# EAGLE board PCB_E_BOOK_v1_v108 (EAGLE 9.7.0)
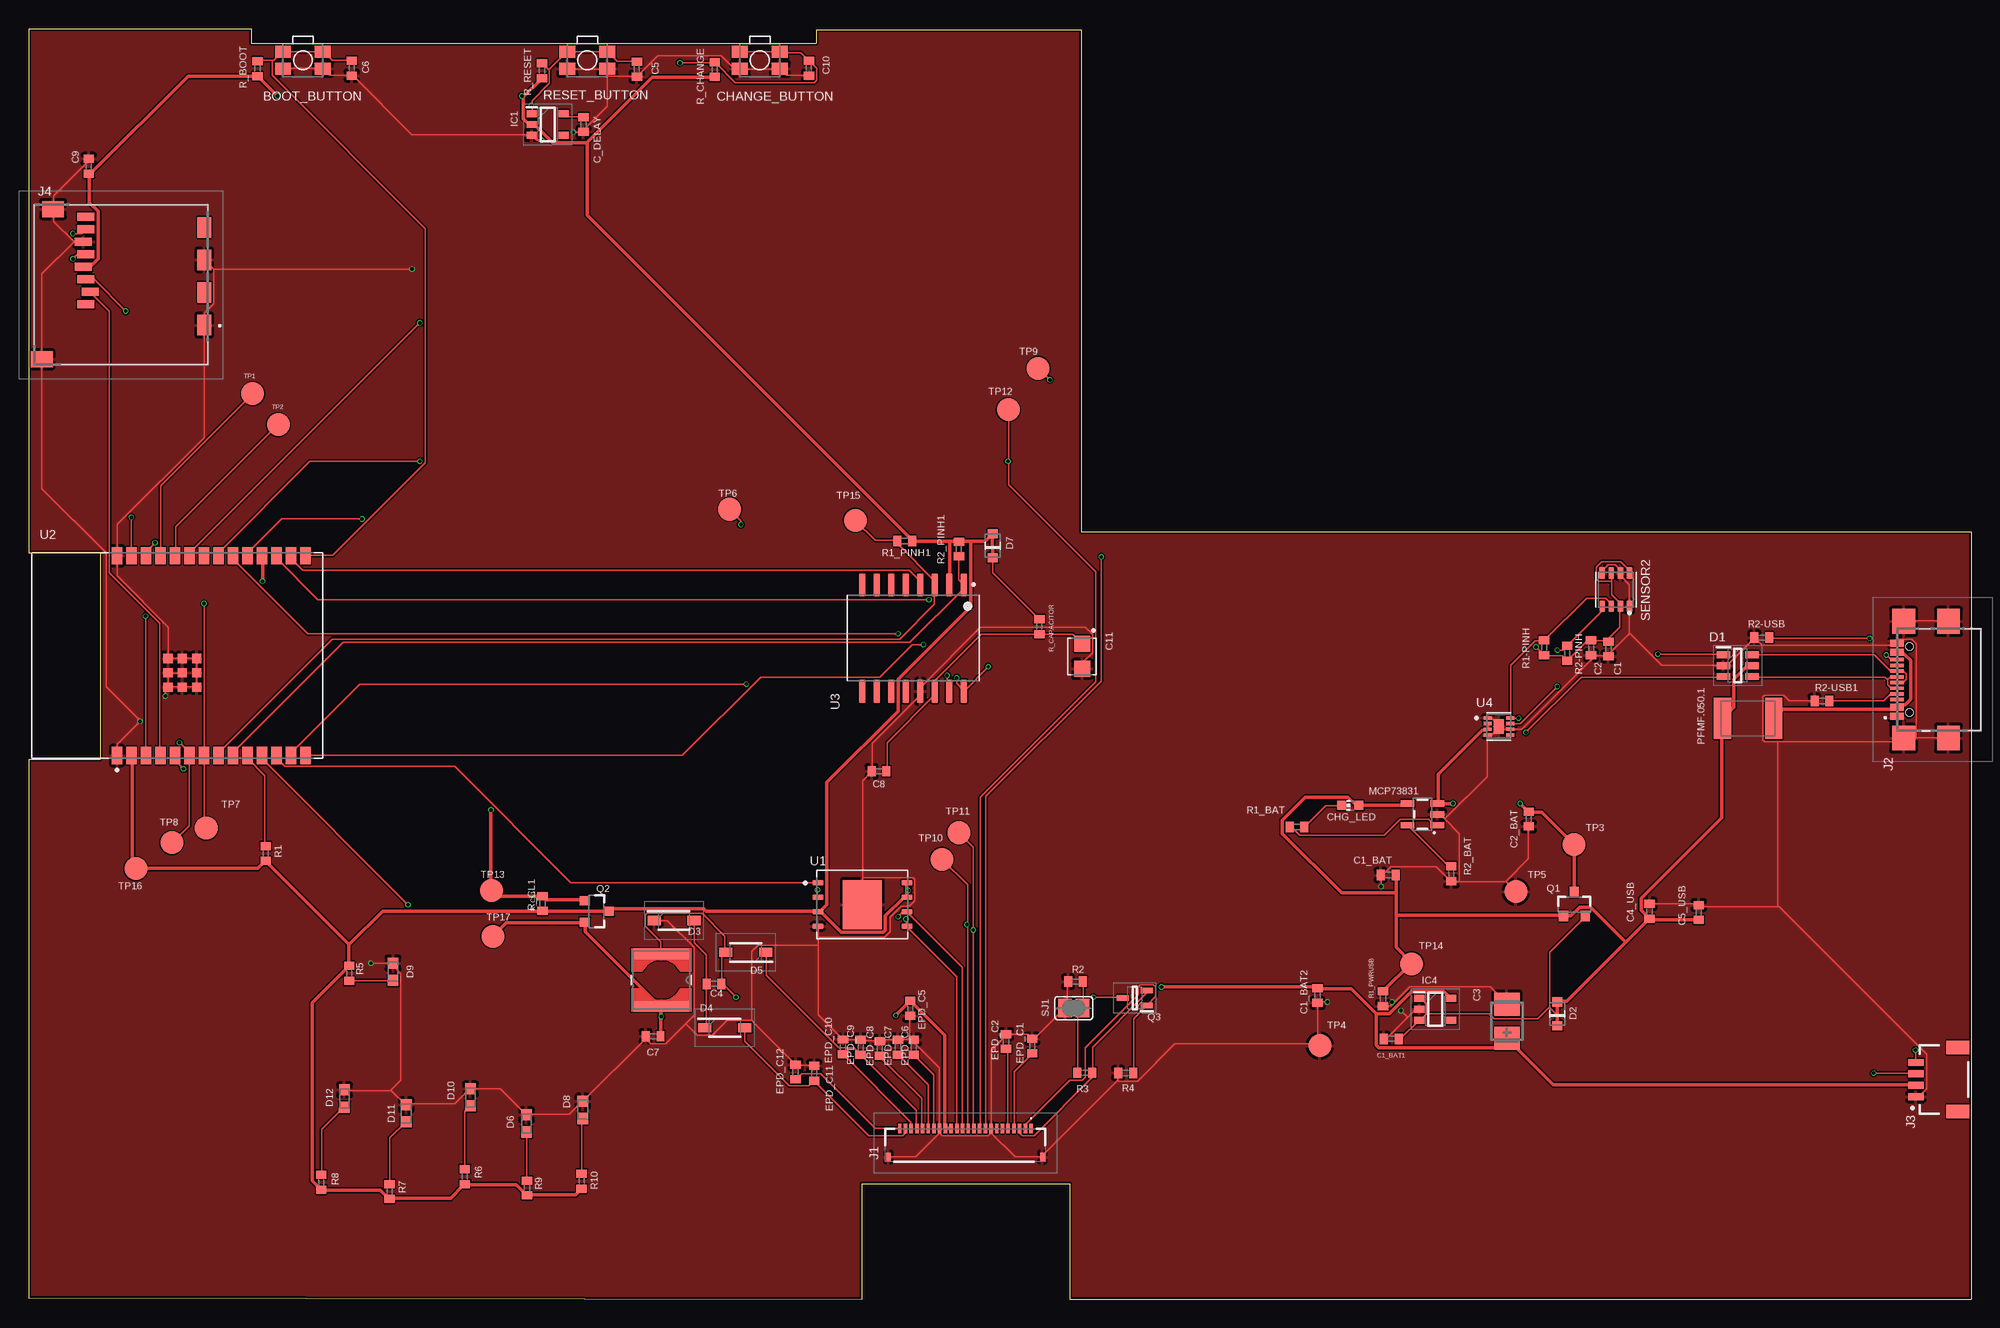
[diagram p0: board, top side]
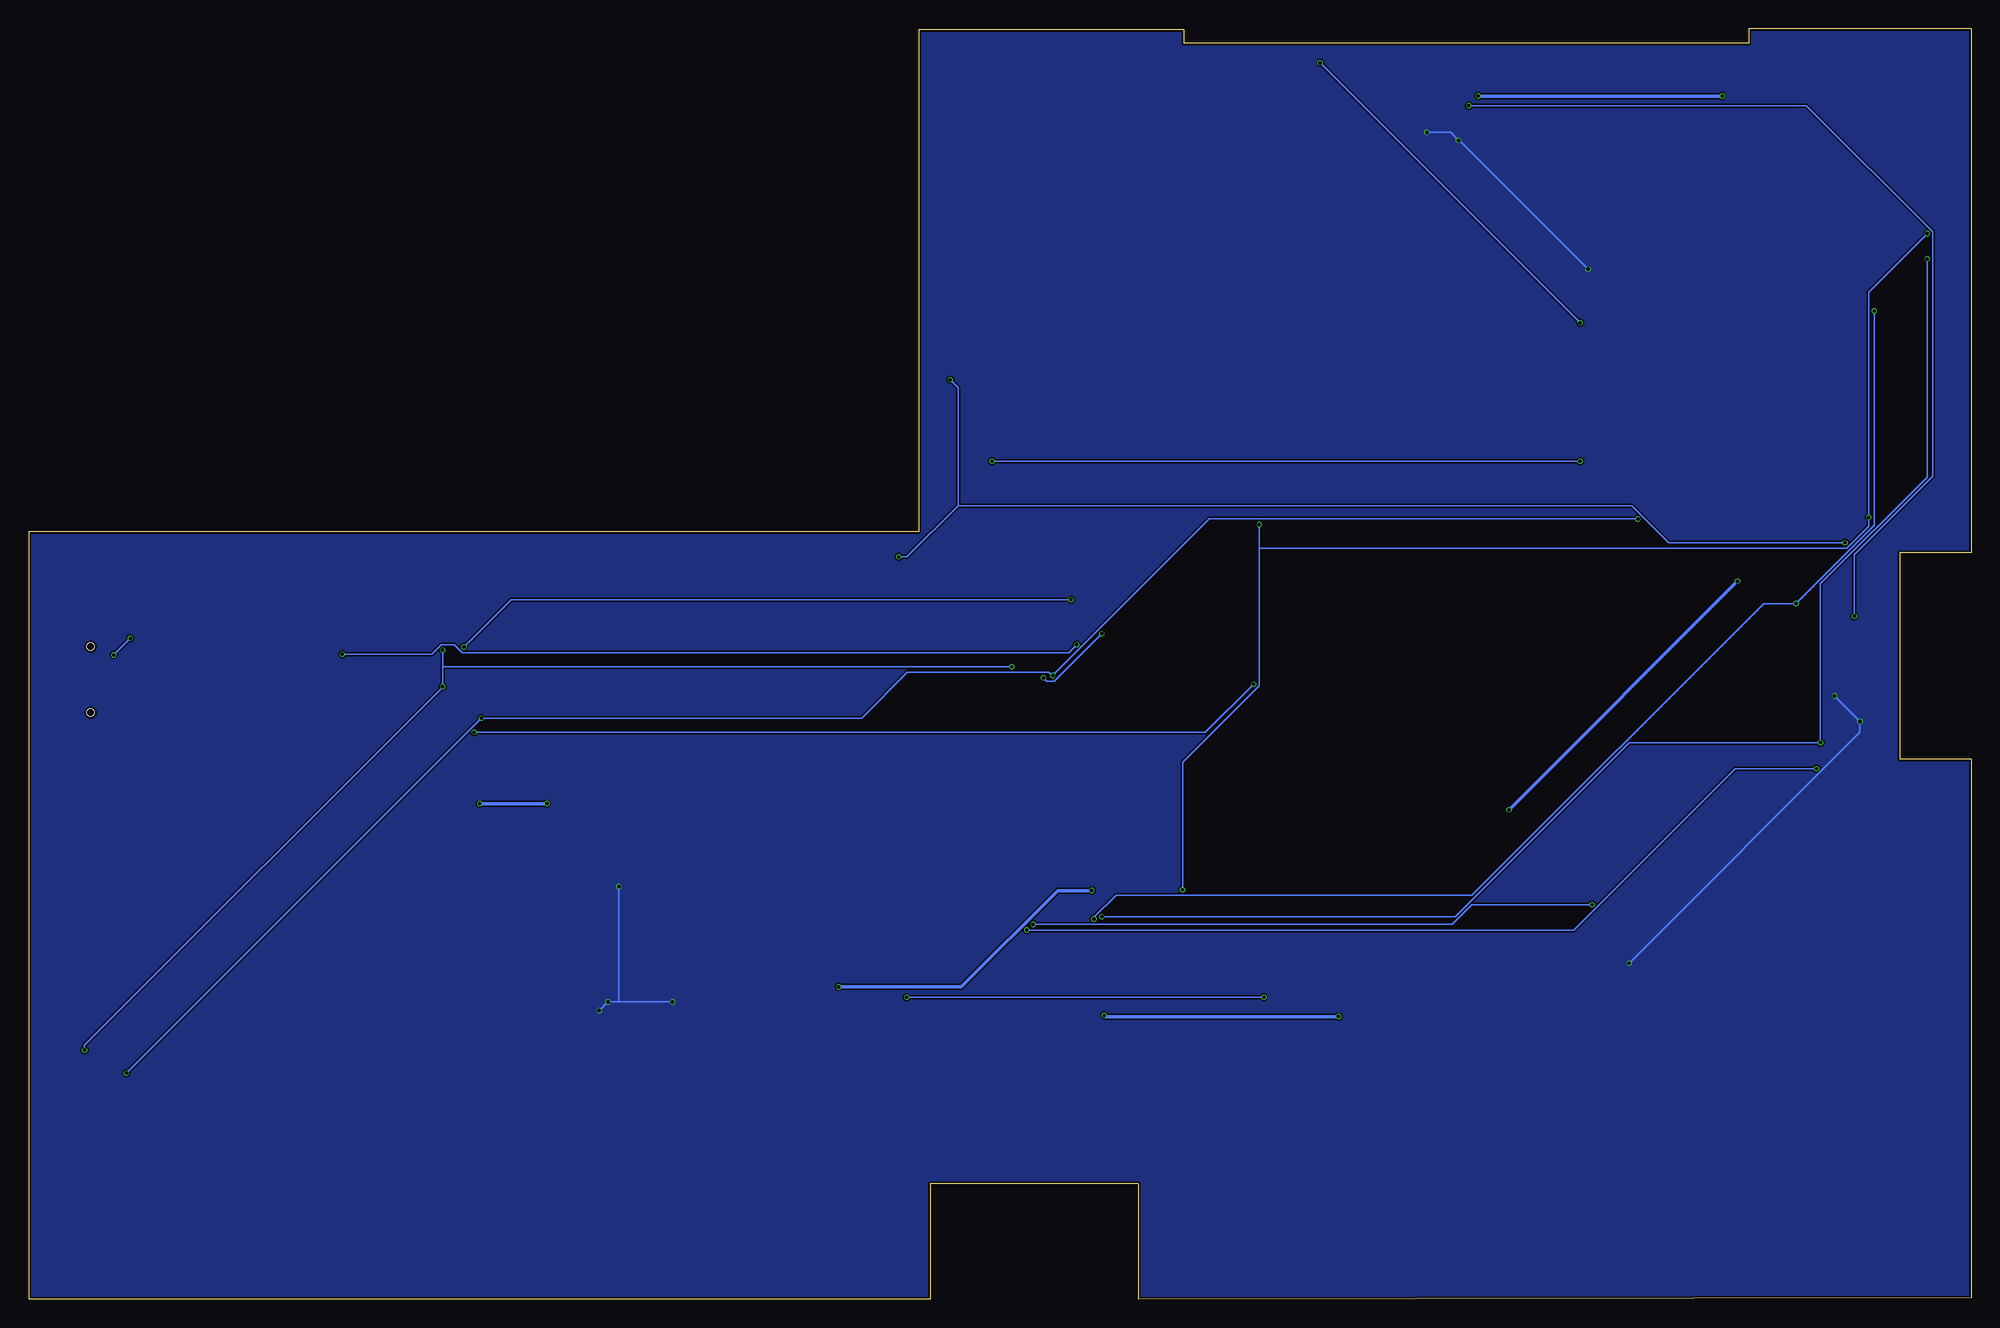
[diagram p1: board, bottom side, seen from below]

Size 170.2 x 111.3 mm. Coordinates in mm from the lower left corner, seen from the top.
Outline: 92.2,67.2 170.2,67.2 170.2,0 91.2,0 91.2,10.1 73,10.1 73,0 0,0.1 0,47.3 6.3,47.3 6.3,65.4 0,65.4 0,111.3 19.5,111.3 19.5,110 69,110 69,111.2 92.2,111.2 92.2,67.2
Copper layers (1*16): Top 0.035mm / dielectric 1.6mm / Bottom 0.035mm
Design rules "jlcpcb-2layers.dru": minimum track width 0.15mm, minimum drill 0.3mm, track to track 5mil, track to pad 5mil, pad to pad 5mil, via to via 5mil, smd to smd 5mil, copper to edge 0.2mm, drill to drill 6mil, minimum pad ring 10mil, minimum via ring 3mil, stop-mask expansion 4mil, vias tented up to drill 0mil, thermal gap 10mil
Net classes: 1 Power_Src: width 0.3 mm

## Footprints (pad centres in the part's own frame; a part is rotated, then mirrored left to right if it is on the bottom)
MYBUTTON = smd 1.4 x 1.05: 1 1.75,0.75; 2 -1.75,0.75; 3 -1.75,-0.75; 4 1.75,-0.75
EAGLE-LTSPICE_C0402 = smd 0.7 x 0.9: 1 -0.65,0; 2 0.65,0
RCL_CT3528 = smd 2 x 2.2: + -1.5,0; - 1.5,0
CAPCP3225X100N = smd 1.4 x 1.4: 1 -1.1,0; 2 1.1,0
ADAFRUIT_CHIP-LED0603 = smd 0.8 x 0.8: A 0,-0.75; C 0,0.75
SOT95P280X145-6N = smd 1.2 x 0.6: 1 -1.25,0.95; 2 -1.25,0; 3 -1.25,-0.95; 4 1.25,-0.95; 5 1.25,0; 6 1.25,0.95
ESP32_WROVER_AVX---SD0805S020S1R0_AVX_SD0805S020S1R0_0 = smd 0.8 x 0.9: 1 -1.05,0; 2 1.05,0
SOD3716X135N = smd 1.15 x 0.8: 1 -1.75,0; 2 1.75,0
DIOC1608X36N = smd 0.97 x 0.94: 1 -0.75,0; 2 0.75,0
SOT95P280X125-5N = smd 0.9 x 0.6: 1 -1.4,0.95; 2 -1.4,0; 3 -1.4,-0.95; 4 1.4,-0.95; 5 1.4,0.95
SOT95P280X120-5N = smd 0.9 x 0.6: 1 -1.4,0.95; 2 -1.4,0; 3 -1.4,-0.95; 4 1.4,-0.95; 5 1.4,0.95
FH34SRJ24S05SH99 = smd 0.3 x 0.8: 1 5.75,1.45; 2 5.25,1.45; 3 4.75,1.45; 4 4.25,1.45; 5 3.75,1.45; 6 3.25,1.45; 7 2.75,1.45; 8 2.25,1.45; 9 1.75,1.45; 10 1.25,1.45; 11 0.75,1.45; 12 0.25,1.45; 13 -0.25,1.45; 14 -0.75,1.45; 15 -1.25,1.45; 16 -1.75,1.45; 17 -2.25,1.45; 18 -2.75,1.45; 19 -3.25,1.45; 20 -3.75,1.45; 21 -4.25,1.45; 22 -4.75,1.45; 23 -5.25,1.45; 24 -5.75,1.45 | smd 0.4 x 0.8: MP1 6.75,-1.05; MP2 -6.75,-1.05
SAMACSYS_PARTS_USB4110GFA = smd 0.3 x 1.15: A1 -3.35,3.678; A4 -2.55,3.678; A5 -1.25,3.678; A6 -0.25,3.678; A7 0.25,3.678; A8 1.25,3.678; A9 2.55,3.678; A12 3.35,3.678; B1 3.05,3.678; B4 2.25,3.678; B5 1.75,3.678; B6 0.75,3.678; B7 -0.75,3.678; B8 -1.75,3.678; B9 -2.25,3.678; B12 -3.05,3.678 | smd 2.18 x 2: MP1 -5.11,-0.827; MP2 5.11,-0.827; MP3 -5.11,3.103; MP4 5.11,3.103 | hole 0.65: -2.89,2.603; 2.89,2.603
JST04_1MM_RA = smd 0.6 x 1.35: 1 -1.5,0; 2 -0.5,0; 3 0.5,0; 4 1.5,0 | smd 1.2 x 2: NC1 2.8,-3.675; NC2 -2.8,-3.675
112ATAARR03ATTEND = smd 1.8 x 1.2: G1 10.6,10.4; G2 4.9,10.4; S1 7.75,10.4; S2 2.05,10.4 | smd 1.4 x 1.9: G3 13.6,-3.85; G4 0.45,-2.85 | smd 0.7 x 1.5: P1 8.8,0; P2 7.7,0.4; P3 6.6,0; P4 5.5,-0.2; P5 4.4,0; P6 3.3,-0.2; P7 2.2,0; P8 1.1,0
IND_4828-WE-TPC_WRE = smd 0.889 x 4.826: 1 -2.286,0; 2 2.286,0
ESP32_WROVER_SPARKFUN-IC-POWER_SOT23-5 = smd 0.55 x 1.2: 1 -0.95,-1.3; 2 0,-1.3; 3 0.95,-1.3; 4 0.95,1.3; 5 -0.95,1.3
ESP32C6_VARISTOR_CT/CN1812 = smd 1.5 x 3.6: 1 -2.25,0; 2 2.25,0
ESP32_WROVER_SPARKFUN-DISCRETESEMI_SOT23-3 = smd 0.8 x 0.9: 1 -0.95,-1; 2 0.95,-1; 3 0,1.1
SOT65P210X110-3N = smd 1.05 x 0.5: 1 -1.05,0.65; 2 -1.05,-0.65; 3 1.05,0
ESP32_WROVER_EAGLE-LTSPICE_R0402 = smd 0.7 x 0.9: 1 -0.65,0; 2 0.65,0
ESP32_WROVER_BME680_PSON80P300X300X100-8N = smd 1.016 x 0.5: 1 1.458,1.2; 2 1.458,0.4; 3 1.458,-0.4; 4 1.458,-1.2; 5 -1.458,-1.22; 6 -1.458,-0.4; 7 -1.458,0.4; 8 -1.458,1.2
SJ = smd 1.168 x 1.6: 1 -0.762,0; 2 0.762,0
TP20R = smd 2 x 2: TP 0,0
SON127P600X800X80-9N = smd 0.94 x 0.44: 1 -3.895,1.905; 2 -3.895,0.635; 3 -3.895,-0.635; 4 -3.895,-1.905; 5 3.895,-1.905; 6 3.895,-0.635; 7 3.895,0.635; 8 3.895,1.905 | smd 3.4 x 4.3: 9 0,0
XCVR_ESP32-C6-WROOM-1-N8 = smd 1.5 x 0.9: 1 -8.75,5.26; 2 -8.75,3.99; 3 -8.75,2.72; 4 -8.75,1.45; 5 -8.75,0.18; 6 -8.75,-1.09; 7 -8.75,-2.36; 8 -8.75,-3.63; 9 -8.75,-4.9; 10 -8.75,-6.17; 11 -8.75,-7.44; 12 -8.75,-8.71; 13 -8.75,-9.98; 14 -8.75,-11.25; 15 8.75,-11.25; 16 8.75,-9.98; 17 8.75,-8.71; 18 8.75,-7.44; 19 8.75,-6.17; 20 8.75,-4.9; 21 8.75,-3.63; 22 8.75,-2.36; 23 8.75,-1.09; 24 8.75,0.18; 25 8.75,1.45; 26 8.75,2.72; 27 8.75,3.99; 28 8.75,5.26 | smd 0.8 x 0.8: 29_1 -2.755,0.79; 29_2 -1.505,0.79; 29_3 -0.255,0.79; 29_4 -2.755,-0.46; 29_5 -1.505,-0.46; 29_6 -0.255,-0.46; 29_7 -2.755,-1.71; 29_8 -1.505,-1.71; 29_9 -0.255,-1.71
SOIC127P1032X265-16N = smd 2.05 x 0.59: 1 -4.655,4.445; 2 -4.655,3.175; 3 -4.655,1.905; 4 -4.655,0.635; 5 -4.655,-0.635; 6 -4.655,-1.905; 7 -4.655,-3.175; 8 -4.655,-4.445; 9 4.655,-4.445; 10 4.655,-3.175; 11 4.655,-1.905; 12 4.655,-0.635; 13 4.655,0.635; 14 4.655,1.905; 15 4.655,3.175; 16 4.655,4.445
SON50P200X200X80-9N = smd 0.76 x 0.27: 1 -0.985,0.75; 2 -0.985,0.25; 3 -0.985,-0.25; 4 -0.985,-0.75; 5 0.985,-0.75; 6 0.985,-0.25; 7 0.985,0.25; 8 0.985,0.75 | smd 0.9 x 1.3: 9 0,0

## Placement (x,y rotation side)
BOOT_BUTTON  BUTTON_CUSYOMV1  [MYBUTTON]  24.04,108.52 180 top
C1  100nF  [EAGLE-LTSPICE_C0402]  138.4,56.95 270 top
C1_BAT  10uF  [EAGLE-LTSPICE_C0402]  119.1,37.15 180 top
C1_BAT1  4.7uF  [EAGLE-LTSPICE_C0402]  119.37,22.79 180 top
C1_BAT2  4.7uF  [EAGLE-LTSPICE_C0402]  112.91,26.59 270 top
C2  100nF  [EAGLE-LTSPICE_C0402]  136.88,57.05 270 top
C2_BAT  4.7uF  [EAGLE-LTSPICE_C0402]  131.41,42.05 270 top
C3  100uF TANT  [RCL_CT3528]  129.51,24.34 90 top
C4  4.7uF/25V  [EAGLE-LTSPICE_C0402]  60.04,27.61 0 top
C4_USB  100nF  [EAGLE-LTSPICE_C0402]  142,33.97 90 top
C5  1uF  [EAGLE-LTSPICE_C0402]  53.29,107.73 270 top
C5_USB  4.7uF  [EAGLE-LTSPICE_C0402]  146.31,33.87 90 top
C6  100nF  [EAGLE-LTSPICE_C0402]  28.32,107.83 270 top
C7  10uF  [EAGLE-LTSPICE_C0402]  54.71,23.03 180 top
C8  100nF  [EAGLE-LTSPICE_C0402]  74.5,46.23 180 top
C9  100nF  [EAGLE-LTSPICE_C0402]  5.28,99.23 90 top
C10  100nF  [EAGLE-LTSPICE_C0402]  68.36,107.83 270 top
C11  CPH3225A  [CAPCP3225X100N]  92.29,56.31 270 top
C_DELAY  100nF  [EAGLE-LTSPICE_C0402]  48.61,102.89 270 top
CHANGE_BUTTON  BUTTON_CUSYOMV1  [MYBUTTON]  64.06,108.51 180 top
CHG_LED  [ADAFRUIT_CHIP-LED0603]  115.79,43.25 90 top
D1  USBLC6-2SC6Y  [SOT95P280X145-6N]  149.72,55.49 0 top
D2  SD0805S020S1R0  [ESP32_WROVER_AVX---SD0805S020S1R0_AVX_SD0805S020S1R0_0]  133.91,24.98 90 top
D3  MBR0530  [SOD3716X135N]  56.55,33.17 0 top
D4  MBR0530  [SOD3716X135N]  60.99,23.77 0 top
D5  MBR0530  [SOD3716X135N]  62.83,30.37 180 top
D6  PGB1010603MR  [DIOC1608X36N]  43.62,15.39 270 top
D7  ESP32_WROVER_AVX---SD0805S020S1R0_AVX_SD0805S020S1R0_0_0  [ESP32_WROVER_AVX---SD0805S020S1R0_AVX_SD0805S020S1R0_0]  84.46,65.98 90 top
D8  PGB1010603MR  [DIOC1608X36N]  48.55,16.57 270 top
D9  PGB1010603MR  [DIOC1608X36N]  31.93,28.67 270 top
D10  PGB1010603MR  [DIOC1608X36N]  38.71,17.67 270 top
D11  PGB1010603MR  [DIOC1608X36N]  33.09,16.27 270 top
D12  PGB1010603MR  [DIOC1608X36N]  27.67,17.57 269.7 top
EPD_C1  1uF/50v  [EAGLE-LTSPICE_C0402]  87.92,22.17 90 top
EPD_C2  1uF/50v  [EAGLE-LTSPICE_C0402]  85.63,22.57 90 top
EPD_C5  1uF/50v  [EAGLE-LTSPICE_C0402]  77.24,25.47 270 top
EPD_C6  1uF/50v  [EAGLE-LTSPICE_C0402]  77.55,22.07 90 top
EPD_C7  1uF/50v  [EAGLE-LTSPICE_C0402]  76.16,22.07 90 top
EPD_C8  1uF/50v  [EAGLE-LTSPICE_C0402]  74.58,21.95 90 top
EPD_C9  1uF/50v  [EAGLE-LTSPICE_C0402]  72.89,22.05 90 top
EPD_C10  1uF/50v  [EAGLE-LTSPICE_C0402]  71.35,22.09 90 top
EPD_C11  1uF/50v  [EAGLE-LTSPICE_C0402]  68.83,19.79 90 top
EPD_C12  1uF/50v  [EAGLE-LTSPICE_C0402]  67.19,19.89 90 top
IC1  BD5229G-TR  [SOT95P280X125-5N]  45.49,102.89 0 top
IC4  XC6220A331MR-G  [SOT95P280X120-5N]  123.23,25.39 0 top
J1  FH34SRJ-24S-0.5SH_99_  [FH34SRJ24S05SH99]  82.07,13.49 0 top
J2  SAMACSYS_PARTS_USB4110-GF-A  [SAMACSYS_PARTS_USB4110GFA]  167.36,54.26 90 top
J3  QWIIC_RIGHT_ANGLE  [JST04_1MM_RA]  165.32,19.23 90 top
J4  112A-TAAR-R03_ATTEND  [112ATAARR03ATTEND]  5,95.93 270 top
L1  68uH  [IND_4828-WE-TPC_WRE]  55.43,27.95 270 top
MCP73831  ESP32_WROVER_SPARKFUN-IC-POWER_MCP73831  [ESP32_WROVER_SPARKFUN-IC-POWER_SOT23-5]  122.11,42.46 90 top
PFMF.050.1  ESP32C6_VARISTORCN1812  [ESP32C6_VARISTOR_CT/CN1812]  150.64,50.87 180 top
Q1  20V/4.2A/52mΩ/1.4W  [ESP32_WROVER_SPARKFUN-DISCRETESEMI_SOT23-3]  135.41,34.56 0 top
Q2  20V/4.2A/52mΩ/1.4W  [ESP32_WROVER_SPARKFUN-DISCRETESEMI_SOT23-3]  49.73,33.96 270 top
Q3  SI1308EDL-T1-GE3  [SOT65P210X110-3N]  96.91,26.38 180 top
R1  10K  [ESP32_WROVER_EAGLE-LTSPICE_R0402]  20.77,39.03 270 top
R1-PINH  10K  [ESP32_WROVER_EAGLE-LTSPICE_R0402]  132.76,57.07 270 top
R1_BAT  200  [ESP32_WROVER_EAGLE-LTSPICE_R0402]  111.12,41.35 180 top
R1_PINH1  10K  [ESP32_WROVER_EAGLE-LTSPICE_R0402]  76.76,66.41 0 top
R1_PWRUSB  100K  [ESP32_WROVER_EAGLE-LTSPICE_R0402]  118.65,26.31 90 top
R2  2.2  [ESP32_WROVER_EAGLE-LTSPICE_R0402]  91.71,27.81 0 top
R2-PINH  10K  [ESP32_WROVER_EAGLE-LTSPICE_R0402]  134.79,56.57 270 top
R2-USB  5k1  [ESP32_WROVER_EAGLE-LTSPICE_R0402]  151.84,57.95 180 top
R2-USB1  5k1  [ESP32_WROVER_EAGLE-LTSPICE_R0402]  157.11,52.39 0 top
R2_BAT  2K  [ESP32_WROVER_EAGLE-LTSPICE_R0402]  124.63,37.25 90 top
R2_PINH1  10K  [ESP32_WROVER_EAGLE-LTSPICE_R0402]  81.5,65.71 90 top
R3  0.47  [ESP32_WROVER_EAGLE-LTSPICE_R0402]  92.53,19.83 180 top
R4  10k  [ESP32_WROVER_EAGLE-LTSPICE_R0402]  96.1,19.81 0 top
R5  10K  [ESP32_WROVER_EAGLE-LTSPICE_R0402]  28.09,28.53 90 top
R6  10K  [ESP32_WROVER_EAGLE-LTSPICE_R0402]  38.21,10.73 270 top
R7  10K  [ESP32_WROVER_EAGLE-LTSPICE_R0402]  31.63,9.43 270 top
R8  10K  [ESP32_WROVER_EAGLE-LTSPICE_R0402]  25.65,10.23 270 top
R9  10K  [ESP32_WROVER_EAGLE-LTSPICE_R0402]  43.67,9.73 270 top
R10  10K  [ESP32_WROVER_EAGLE-LTSPICE_R0402]  48.45,10.33 270 top
R_BOOT  10K  [ESP32_WROVER_EAGLE-LTSPICE_R0402]  20.06,107.79 90 top
R_CAPACITOR  15  [ESP32_WROVER_EAGLE-LTSPICE_R0402]  88.55,58.91 270 top
R_CHANGE  10k  [ESP32_WROVER_EAGLE-LTSPICE_R0402]  60.12,107.71 90 top
R_CL1  10K  [ESP32_WROVER_EAGLE-LTSPICE_R0402]  45.02,34.65 90 top
R_RESET  10K  [ESP32_WROVER_EAGLE-LTSPICE_R0402]  44.98,107.61 90 top
RESET_BUTTON  BUTTON_CUSYOMV1  [MYBUTTON]  48.95,108.52 180 top
SENSOR2  ESP32_WROVER_BME680_BME680  [ESP32_WROVER_BME680_PSON80P300X300X100-8N]  139.05,62.14 270 top
SJ1  [SJ]  91.56,25.49 0 top
TP1  TPTP20R  [TP20R]  19.63,79.31 0 top
TP2  TPTP20R  [TP20R]  21.88,76.61 0 top
TP3  TPTP20R  [TP20R]  135.37,39.81 0 top
TP4  TPTP20R  [TP20R]  113.13,22.21 0 top
TP5  TPTP20R  [TP20R]  130.29,35.69 0 top
TP6  TPTP20R  [TP20R]  61.41,69.19 0 top
TP7  TPTP20R  [TP20R]  15.57,41.25 0 top
TP8  TPTP20R  [TP20R]  12.55,39.99 0 top
TP9  TPTP20R  [TP20R]  88.44,81.53 0 top
TP10  TPTP20R  [TP20R]  80.02,38.51 0 top
TP11  TPTP20R  [TP20R]  81.49,40.85 0 top
TP12  TPTP20R  [TP20R]  85.84,77.92 0 top
TP13  TPTP20R  [TP20R]  40.56,35.81 0 top
TP14  TPTP20R  [TP20R]  121.15,29.37 0 top
TP15  TPTP20R  [TP20R]  72.43,68.21 0 top
TP16  TPTP20R  [TP20R]  9.41,37.71 0 top
TP17  TPTP20R  [TP20R]  40.67,31.78 0 top
U1  W25Q512JVEIQ  [SON127P600X800X80-9N]  73.04,34.56 0 top
U2  ESP32-C6-WROOM-1-N8  [XCVR_ESP32-C6-WROOM-1-N8]  13.01,56.37 90 top
U3  DS3231SN#  [SOIC127P1032X265-16N]  77.49,57.9 270 top
U4  MAX17048G+T10  [SON50P200X200X80-9N]  128.8,50.16 0 top

## Library data of the parts
BOOT_BUTTON C1 C1_BAT C1_BAT1 C1_BAT2 C2 C2_BAT C4 C4_USB C5 C5_USB C6-C11 C_DELAY CHANGE_BUTTON CHG_LED D2-D12 EPD_C1 EPD_C2 EPD_C5-EPD_C12 L1 PFMF.050.1 R1 R1-PINH R1_BAT R1_PINH1 R1_PWRUSB R2 R2-PINH R2-USB R2-USB1 R2_BAT R2_PINH1 R3-R10 R_BOOT R_CAPACITOR R_CHANGE R_CL1 R_RESET RESET_BUTTON SJ1 TP1-TP17 = DeskAssistant v19 v1
C3 = DeskAssistant v19 v1; SPICEPREFIX: C
D1 = DeskAssistant v19 v1; AVAILABILITY: In Stock; CHECK_PRICES: https://www.snapeda.com/parts/USBLC6-2SC6Y/STMicroelectronics/view-part/?ref=eda; DESCRIPTION: 17V Clamp 5A (8/20µs) Ipp Tvs Diode Surface Mount SOT-23-6; MF: STMicroelectronics; MP: USBLC6-2SC6Y; PACKAGE: SOT-23-6 STMicroelectronics; PRICE: None; SNAPEDA_LINK: https://www.snapeda.com/parts/USBLC6-2SC6Y/STMicroelectronics/view-part/?ref=snap
IC1 = DeskAssistant v19 v1; DESCRIPTION: Voltage Detector with Adjustable Delay Time: CMOS processes are utilized to develop high precision, low current consumption CMOS reset ICs that allow arbitrary setting of the delay time. The extensive lineup includes both Nch Open Drain and CMOS output types in a wide range of detection voltages (from 2.3V to 6.0V, in 0.1V steps), enabling selection of the ideal solution based on customer requirements. In addition, the entire series is of course both lead-free and RoHS-compliant.; HEIGHT: 1.25mm; MANUFACTURER_NAME: ROHM Semiconductor; MANUFACTURER_PART_NUMBER: BD5229G-TR; MOUSER_PART_NUMBER: 755-BD5229G-TR; MOUSER_PRICE-STOCK: https://www.mouser.co.uk/ProductDetail/ROHM-Semiconductor/BD5229G-TR?qs=4kLU8WoGk0vvnhrrYwdszw%3D%3D
IC4 = DeskAssistant v19 v1; DESCRIPTION: LDO Voltage Regulators; HEIGHT: 1.2mm; MANUFACTURER_NAME: Torex; MANUFACTURER_PART_NUMBER: XC6220A331MR-G; MOUSER_PART_NUMBER: 865-XC6220A331MR-G; MOUSER_PRICE-STOCK: https://www.mouser.co.uk/ProductDetail/Torex-Semiconductor/XC6220A331MR-G?qs=AsjdqWjXhJ8ZSWznL1J0gg%3D%3D
J1 = DeskAssistant v19 v1; DESCRIPTION: 24 Position FFC, FPC Connector Contacts, Top and Bottom 0.020" (0.50mm) Surface Mount, Right Angle; HEIGHT: 1.1mm; MANUFACTURER_NAME: Hirose; MANUFACTURER_PART_NUMBER: FH34SRJ-24S-0.5SH(99); MOUSER_PART_NUMBER: 798-FH34SRJ24S05SH99; MOUSER_PRICE-STOCK: https://www.mouser.co.uk/ProductDetail/Hirose-Connector/FH34SRJ-24S-0.5SH99?qs=vcbW%252B4%252BSTIpKBl5ap9J8Fw%3D%3D
J2 = DeskAssistant v19 v1; DESCRIPTION: CONN USB 2.0 TYPE-C R/A SMT; HEIGHT: 3.26mm; MANUFACTURER_NAME: GCT (GLOBAL CONNECTOR TECHNOLOGY); MANUFACTURER_PART_NUMBER: USB4110-GF-A; MOUSER_PART_NUMBER: 640-USB4110-GF-A; MOUSER_PRICE-STOCK: https://www.mouser.co.uk/ProductDetail/GCT/USB4110-GF-A?qs=KUoIvG%2F9IlYiZvIXQjyJeA%3D%3D
J3 = DeskAssistant v19 v1; PROD_ID: CONN-13694
J4 = DeskAssistant v19 v1; DESCRIPTION: Micro SD Card Socket, Push-Push Type, Top Mount, SMT, H=1.83mm, 10u; HEIGHT: 1.9mm; MANUFACTURER_NAME: ATTEND; MANUFACTURER_PART_NUMBER: 112A-TAAR-R03 ATTEND
MCP73831 = DeskAssistant v19 v1; PROD_ID: IC-09995
Q1 Q2 = DeskAssistant v19 v1; PROD_ID: TRAN-14388
Q3 = DeskAssistant v19 v1; AVAILABILITY: In Stock; CHECK_PRICES: https://www.snapeda.com/parts/SI1308EDL-T1-GE3/Vishay+Siliconix/view-part/?ref=eda; DESCRIPTION: Si1308EDL-T1-GE3 N-channel MOSFET Transistor, 1.5 A, 30 V, 3-Pin SC-70 | Siliconix / Vishay SI1308EDL-T1-GE3; MF: Vishay Siliconix; MP: SI1308EDL-T1-GE3; PACKAGE: SOT-323 Vishay Semiconductor; PRICE: None; PURCHASE-URL: https://www.snapeda.com/api/url_track_click_mouser/?unipart_id=274603&manufacturer=Vishay Siliconix&part_name=SI1308EDL-T1-GE3&search_term=None; SNAPEDA_LINK: https://www.snapeda.com/parts/SI1308EDL-T1-GE3/Vishay+Siliconix/view-part/?ref=snap
SENSOR2 = DeskAssistant v19 v1; AVAILABILITY: Unavailable; DESCRIPTION: Integrated Environmental Unit; MF: Bosch Sensortec; MP: BME680; PACKAGE: LGA-8 Bosch Tools; PRICE: None
U1 = DeskAssistant v19 v1; AVAILABILITY: In Stock; CHECK_PRICES: https://www.snapeda.com/parts/W25Q512JVEIQ/Winbond+Electronics/view-part/?ref=eda; DESCRIPTION: FLASH - NOR Memory IC 512Mb (64M x 8) SPI - Quad I/O 133 MHz 8-WSON (8x6); MF: Winbond Electronics; MP: W25Q512JVEIQ; PACKAGE: Package; PRICE: None; SNAPEDA_LINK: https://www.snapeda.com/parts/W25Q512JVEIQ/Winbond+Electronics/view-part/?ref=snap
U2 = DeskAssistant v19 v1; AVAILABILITY: In Stock; CHECK_PRICES: https://www.snapeda.com/parts/ESP32-C6-WROOM-1-N8/Espressif+Systems/view-part/?ref=eda; DESCRIPTION: Multiprotocol Modules ESP32-C6 module, Wi-Fi 6 in 2.4 GHz band, Bluetooth 5, Zigbee 3.0 and Thread. ESP34-WROOM Compatible - ENGINEERING SAMPLE; MF: Espressif Systems; MP: ESP32-C6-WROOM-1-N8; PACKAGE: None; PRICE: None; SNAPEDA_LINK: https://www.snapeda.com/parts/ESP32-C6-WROOM-1-N8/Espressif+Systems/view-part/?ref=snap
U3 = DeskAssistant v19 v1; AVAILABILITY: In Stock; CHECK_PRICES: https://www.snapeda.com/parts/DS3231SN%23/Analog+Devices/view-part/?ref=eda; DESCRIPTION: Extremely Accurate I²C-Integrated RTC/TCXO/Crystal; MF: Analog Devices; MP: DS3231SN#; PACKAGE: SOIC-16 Maxim; PRICE: None; PURCHASE-URL: https://www.snapeda.com/api/url_track_click_mouser/?unipart_id=99048&manufacturer=Analog Devices&part_name=DS3231SN#&search_term=None; SNAPEDA_LINK: https://www.snapeda.com/parts/DS3231SN%23/Analog+Devices/view-part/?ref=snap
U4 = DeskAssistant v19 v1; AVAILABILITY: In Stock; CHECK_PRICES: https://www.snapeda.com/parts/MAX17048G+T10/Analog+Devices/view-part/?ref=eda; DESCRIPTION: 3µA 1-Cell/2-Cell Fuel Gauge with ModelGauge; MF: Analog Devices; MP: MAX17048G+T10; PACKAGE: TDFN-8 Maxim; PRICE: None; PURCHASE-URL: https://www.snapeda.com/api/url_track_click_mouser/?unipart_id=329239&manufacturer=Analog Devices&part_name=MAX17048G+T10&search_term=None; SNAPEDA_LINK: https://www.snapeda.com/parts/MAX17048G+T10/Analog+Devices/view-part/?ref=snap

## Nets
3V3 [Power_Src]: C1_BAT2.1 C3.+ C9.1 D7.1 IC1.2 IC4.5 J3.2 J4.P4 Q2.3 R1.2 R1_PINH1.2 R2_PINH1.2 R5.2 R6.2 R7.2 R8.2 R9.2 R10.2 R_BOOT.1 R_CHANGE.1 R_CL1.1 R_RESET.1 TP16.TP U1.3 U1.7 U1.8 U2.2 U3.2
32KHZ: R2_PINH1.1 U2.9 U3.1
DN: D1.4 J2.A7 J2.B7
DP: D1.6 J2.A6 J2.B6
EPD_3V3 [Power_Src]: C7.1 EPD_C5.1 J1.15 J1.16 L1.2 Q2.2 TP17.TP
EPD_3V3_C [Power_Src]: Q2.1 R_CL1.2 TP13.TP U2.18
EPD_BUSY: J1.9 TP9.TP U2.26
EPD_CS: J1.12 TP10.TP U2.11
EPD_DC: J1.11 TP11.TP U2.5
EPD_RST: J1.10 TP12.TP U2.21
FLASH_CS: U1.1 U2.12
GDR: J1.2 Q3.1 R4.2
GND: BOOT_BUTTON.1 BOOT_BUTTON.2 C1.2 C1_BAT1.2 C1_BAT2.2 C1_BAT.2 C2.2 C2_BAT.2 C3.- C4_USB.2 C5.2 C5_USB.2 C6.2 C7.2 C8.2 C9.2 C10.2 C11.2 C_DELAY.2 CHANGE_BUTTON.1 CHANGE_BUTTON.2 D1.2 D3.1 D6.1 D8.1 D9.1 D10.1 D11.1 D12.1 EPD_C1.2 EPD_C2.2 EPD_C5.2 EPD_C6.2 EPD_C7.2 EPD_C8.2 EPD_C9.2 EPD_C10.2 EPD_C11.2 EPD_C12.2 IC1.3 IC4.2 J1.8 J1.17 J1.MP1 J1.MP2 J2.A1 J2.A12 J2.B1 J2.B12 J2.MP1 J2.MP2 J2.MP3 J2.MP4 J3.1 J4.G1 J4.G2 J4.G3 J4.G4 J4.P6 MCP73831.2 R1_PWRUSB.1 R2-USB1.1 R2-USB.2 R2.1 R2_BAT.1 R4.1 RESET_BUTTON.1 RESET_BUTTON.2 SENSOR2.1 SENSOR2.5 SENSOR2.7 SJ1.1 TP4.TP TP5.TP U1.4 U1.9 U2.1 U2.28 U2.29_1 U2.29_2 U2.29_3 U2.29_4 U2.29_5 U2.29_6 U2.29_7 U2.29_8 U2.29_9 U3.13 U4.1 U4.4 U4.6 U4.9
GPIO8: R1.1 U2.10
I2C_PW: C1.1 C2.1 R1-PINH.2 R2-PINH.2 SENSOR2.2 SENSOR2.6 SENSOR2.8 U2.17
INT_RTC: R1_PINH1.1 TP15.TP U2.8 U3.3
IO/BOOT: BOOT_BUTTON.3 BOOT_BUTTON.4 C6.1 R_BOOT.2 U2.15
IO/CHANGE: C10.1 CHANGE_BUTTON.3 CHANGE_BUTTON.4 R_CHANGE.2 U2.23
MISO: J4.P7 TP6.TP U1.2 U2.27
MOSI: J1.14 J4.P3 TP7.TP U1.5 U2.7
N$1: J2.A5 R2-USB1.2
N$3: C1_BAT1.1 D2.2 IC4.1 IC4.3 Q1.2
N$5: MCP73831.1 R1_BAT.2
N$7: MCP73831.5 R2_BAT.2
N$8: J2.B5 R2-USB.1
N$9: CHG_LED.C R1_BAT.1
N$10: C4.1 D3.2 D4.1
N$12: D12.2 R8.1
N$13: D11.2 R7.1
N$14: D10.2 R6.1
N$15: D9.2 R5.1
N$16: D6.2 R9.1
N$17: D8.2 R10.1
N$18: C_DELAY.1 IC1.5
N$21: D7.2 R_CAPACITOR.1
N$30: EPD_C2.1 J1.5
N$31: EPD_C1.1 J1.4
PREVGH: D5.1 EPD_C9.1 J1.21
PREVGL: D4.2 EPD_C11.1 J1.23
RESE: J1.3 Q3.2 R3.1
RESE': R2.2 R3.2 SJ1.2
RESET: C5.1 IC1.1 R_RESET.2 RESET_BUTTON.3 RESET_BUTTON.4 U2.3
RTC_RST: U2.16 U3.4
RX: TP2.TP U2.24
SCK: J1.13 J4.P5 TP8.TP U1.6 U2.6
SCL: J3.4 R2-PINH.1 SENSOR2.4 U2.20 U3.16 U4.7
SDA: J3.3 R1-PINH.1 SENSOR2.3 U2.19 U3.15 U4.8
SRC: C4.2 D5.2 L1.1 Q3.3
SS_SD: J4.P2 U2.4
TX: TP1.TP U2.25
USB_D+: D1.1 U2.14
USB_D-: D1.3 U2.13
VBAT [Power_Src]: C2_BAT.1 MCP73831.3 Q1.3 TP3.TP U4.2 U4.3
VBUS [Power_Src]: C1_BAT.1 C4_USB.1 C5_USB.1 CHG_LED.A D1.5 D2.1 MCP73831.4 PFMF.050.1.2 Q1.1 R1_PWRUSB.2 TP14.TP
VRTC: C8.1 C11.1 R_CAPACITOR.2 U3.14
VRTC1: EPD_C12.1 J1.24
VRTC4: EPD_C8.1 J1.20
VRTC5: EPD_C7.1 J1.19
VRTC6: EPD_C6.1 J1.18
VRTC7: EPD_C10.1 J1.22
VUSB [Power_Src]: J2.A4 J2.A9 J2.B4 J2.B9 PFMF.050.1.1

## Tracks (layer width: path | path; a pad name or v marks a point on that pad's centre or on a via)
3V3  (via drill 0.3)
  Top 0.3: 118.07,24.99 115.86,27.2 112.95,27.2 C1_BAT2.1 112.81,27.34 v99.23,27.34 | 118.07,24.99 119.18,24.99 121.12,26.93 124.03,26.93 124.58,26.37 IC4.5 | J3.2 165.3,18.76 133.58,18.76 129.57,22.77 C3.+ 129.43,22.7 128.74,22.01 118.28,22.01 118.07,22.22 118.07,24.99 | J4.P4 5.4,90.43 6.09,91.12 6.09,95.28 5.33,96.04 5.33,98.53 C9.1 5.47,98.6 13.99,107.12 20.01,107.12 R_BOOT.1 20.15,107.05 v21.81,105.39 | R10.2 48.41,9.62 47.92,9.13 43.7,9.13 R9.2 43.56,9.2 42.73,10.03 38.23,10.03 R6.2 38.09,9.96 36.98,8.85 31.72,8.85 R7.2 31.58,8.78 30.82,9.55 25.69,9.55 R8.2 25.55,9.69 24.86,10.38 24.86,25.96 27.98,29.07 R5.2 28.05,29.21 28.05,31.08 | 43.35,105.32 43.35,103.38 43.84,102.89 44.04,102.89 IC1.2 44.18,102.83 44.39,102.83 45.91,101.3 48.89,101.3 | 43.35,105.32 44.94,106.91 R_RESET.1 | 48.89,101.3 54.64,107.05 R_CHANGE.1 | U2.2 9.07,47.56 9.07,38.01 9.35,37.73 TP16.TP 9.56,37.73 20.08,37.73 20.64,38.28 R1.2 20.77,38.35 28.05,31.08 | 82.55,66.4 83.79,66.4 84.42,67.02 D7.1 | 82.55,66.4 81.51,66.4 R2_PINH1.2 81.37,66.4 80.68,66.4 | 80.68,66.4 77.42,66.4 R1_PINH1.2 77.35,66.54 48.96,94.93 48.96,101.16 48.89,101.3 | 80.68,66.4 80.68,62.59 U3.2 | U1.3 69.18,33.92 69.39,33.92 71.19,32.12 74.86,32.12 75.07,32.33 75.07,33.58 76.66,35.17 76.87,35.17 U1.7 76.94,35.31 76.94,35.79 | 76.94,35.79 76.94,36.41 U1.8 | 28.05,31.08 28.18,31.15 31.02,33.99 44.87,33.99 R_CL1.1 45.08,33.99 50.83,33.99 Q2.3 50.97,34.06 51.11,34.2 59.14,34.2 59.35,33.99 69.04,33.99 U1.3 | 82.55,66.4 82.55,60.65 76.17,54.28 76.17,51.51 69.94,45.28 69.94,34.55 69.46,34.06 U1.3 | v43.21,105.39 43.35,105.32
  Top 0.3: v77.08,35.79 76.94,35.79
  Bottom 0.3: v43.21,105.39 v21.81,105.39 | v99.23,27.34 88.5,27.34 80.05,35.79 v77.08,35.79
32KHZ
  Top 0.15: R2_PINH1.1 81.51,65.02 81.51,63.01 81.92,62.59 U3.1 81.92,62.52 81.92,62.25 77.21,57.54 27.56,57.54 17.94,47.91 17.94,47.63 U2.9
DN
  Top 0.15: 162.88,54.28 162.88,53.8 163.15,53.52 163.64,53.52 J2.B7 | 162.88,54.28 163.08,54.49 163.64,54.49 J2.A7 | D1.4 151.03,54.49 162.6,54.49 162.81,54.28 162.88,54.28
DP
  Top 0.15: J2.A6 163.71,54.07 164.26,54.07 164.47,54.28 164.47,54.77 164.26,54.97 163.71,54.97 J2.B6 163.64,55.04 163.08,55.04 161.7,56.43 151.03,56.43 D1.6
EPD_3V3  (via drill 0.3)
  Top 0.3: J1.15 J1.16 80.26,15.09 80.26,23.12 77.28,26.1 EPD_C5.1 77.14,26.03 v75.97,24.85 | 55.4,24.75 55.4,25.61 L1.2 55.26,25.68 48.75,32.19 48.75,32.81 Q2.2 48.68,32.95 41.83,32.95 40.72,31.84 TP17.TP | 55.4,24.75 55.4,23.05 C7.1 | v55.44,24.75 55.4,24.75
  Bottom 0.3: v75.97,24.85 75.87,24.75 v55.44,24.75
EPD_3V3_C  (via drill 0.3)
  Top 0.3: Q2.1 48.68,34.96 45.36,34.96 45.08,35.24 R_CL1.2 44.87,35.31 41.06,35.31 40.65,35.72 TP13.TP 40.51,35.86 v40.51,42.86 | v20.5,62.87 20.5,65.08 U2.18
  Bottom 0.3: v40.51,42.86 v20.5,62.87
EPD_BUSY  (via drill 0.3)
  Top 0.15: v93.97,65.02 93.97,54.14 83.86,44.03 83.86,14.95 J1.9 | v89.47,80.53 88.5,81.5 TP9.TP | v11.08,66.26 10.32,65.5 10.32,65.15 U2.26
  Bottom 0.15: v93.97,65.02 93.27,65.02 88.77,69.52 | v89.47,80.53 88.77,79.83 88.77,69.52 | v11.08,66.26 26.52,66.26 29.78,69.52 88.77,69.52
EPD_CS  (via drill 0.3)
  Top 0.15: 82.27,32.81 82.27,36.28 80.05,38.49 TP10.TP | 82.27,32.81 82.27,14.95 J1.12 | v33.24,34.55 20.5,47.29 20.5,47.56 U2.11 | v82.2,32.81 82.27,32.81
  Bottom 0.15: v33.24,34.55 43.77,34.55 45.5,32.81 v82.2,32.81
EPD_DC  (via drill 0.3)
  Top 0.15: J1.11 82.75,14.95 v82.75,32.33 82.75,39.6 81.51,40.85 TP11.TP | v13.57,46.46 12.88,47.15 12.88,47.56 U2.5
  Bottom 0.15: v13.57,46.46 20.71,46.46 34.83,32.33 v82.75,32.33
EPD_RST  (via drill 0.3)
  Top 0.15: 85.87,73.39 85.87,77.9 TP12.TP | 85.87,73.39 85.87,71.32 93.49,63.7 93.49,54.07 83.38,43.96 83.38,14.95 J1.10 | v34.28,73.39 24.65,73.39 16.69,65.43 16.69,65.15 U2.21 | v85.8,73.39 85.87,73.39
  Bottom 0.15: v85.8,73.39 v34.28,73.39
FLASH_CS
  Top 0.15: U1.1 69.11,36.48 47.51,36.48 37.33,46.66 22.44,46.66 21.74,47.36 21.74,47.56 U2.12
GDR
  Top 0.15: J1.2 87.32,15.29 91.2,19.17 92.31,19.17 92.59,19.45 92.59,22.01 97.23,26.65 97.23,27.41 97.36,27.55 98.54,27.55 98.75,27.34 98.75,26.51 97.99,25.75 Q3.1 97.92,25.68 96.81,24.57 96.81,19.86 R4.2
GND  (via drill 0.3)
  Top 0.15: C10.2 66.41,107.19 65.86,107.74 CHANGE_BUTTON.2 65.79,107.74 62.33,107.74 CHANGE_BUTTON.1 62.26,107.81 61.77,107.81 60.66,108.92 55.12,108.92 53.32,107.12 C5.2 53.25,107.12 50.69,107.12 | 50.69,107.12 50.69,107.74 RESET_BUTTON.2 50.62,107.74 47.23,107.74 RESET_BUTTON.1 | 50.69,107.12 50.69,104.49 48.61,102.41 48.61,102.27 C_DELAY.2 48.54,102.2 v47.71,102.2 | BOOT_BUTTON.1 22.3,107.81 25.76,107.81 BOOT_BUTTON.2 25.83,107.74 26.38,107.19 28.25,107.19 C6.2 28.39,107.19 33.59,101.99 44.04,101.99 IC1.3 44.11,101.93 44.53,101.51 v44.94,101.51 | C9.2 5.26,99.85 5.26,99.71 2.22,96.66 2.22,95.48 J4.G4 2.22,95.42 2.22,94.38 3.95,92.65 | 3.95,92.65 4.78,92.65 J4.P6 | 3.95,92.65 3.95,92.58 1.18,89.81 1.18,82.4 J4.G3 1.18,82.33 1.18,70.97 6.79,65.36 6.79,53.66 9.76,50.68 v9.76,50.61 7.76,48.6 7.76,47.63 U2.1 | U2.29_1 12.26,53.66 12.26,54.84 U2.29_2 12.33,54.84 13.43,54.84 U2.29_5 | U2.29_1 12.33,53.66 13.43,53.66 U2.29_4 13.5,53.66 14.68,53.66 U2.29_7 14.75,53.66 14.75,54.84 U2.29_8 14.75,54.91 14.75,56.08 U2.29_9 14.68,56.15 13.5,56.15 U2.29_6 13.43,56.15 12.26,56.15 U2.29_3 12.26,56.22 12.26,58.85 7.76,63.35 7.76,65.08 U2.28 7.76,65.15 7.76,67.86 15.37,75.47 15.37,85.31 J4.G1 15.44,85.38 15.44,86.41 16.2,87.17 16.2,90.22 | v11.98,52.83 11.98,53.38 12.19,53.59 U2.29_1 | 16.2,90.22 15.44,90.98 J4.G2 | 16.2,90.22 v33.59,90.22 | C4_USB.2 142.03,34.62 146.19,34.62 146.26,34.55 C5_USB.2 146.36,34.38 153.35,34.38 | 153.35,34.38 153.25,34.48 153.25,48.81 | 153.35,34.38 166.27,21.46 166.27,18.41 165.65,17.79 165.37,17.79 J3.1 | 163.71,57.81 163.71,58.85 164.19,59.34 J2.MP4 164.26,59.41 168.14,59.41 J2.MP2
  Top 0.15: 163.71,57.81 163.71,57.68 J2.A12 163.71,57.61 163.71,57.33 J2.B1 163.64,57.26 151.87,57.26 151.24,57.88 R2-USB.2 151.17,57.88 148.82,55.53 148.47,55.53 D1.2 148.4,55.53 143.07,55.53 140.3,58.3 140.23,58.3 | J2.B12 163.71,51.16 163.71,50.96 J2.A1 163.71,50.89 163.71,48.88 J2.MP3 | 153.25,48.81 163.91,48.81 J2.MP3 | 153.25,48.81 152.07,48.81 151.94,48.95 151.94,52.76 152.07,52.9 153.74,52.9 154.22,52.41 156.44,52.41 R2-USB1.1 | 165.37,49.16 164.33,49.16 J2.MP3 | 165.37,49.16 168.14,49.16 J2.MP1 | 163.71,57.81 164.95,57.81 165.37,57.4 165.37,49.16 | SENSOR2.5 137.88,63.63 137.88,63.84 138.36,64.32 138.99,64.32 139.4,63.91 139.4,63.63 SENSOR2.7 139.47,63.56 139.47,63.35 140.23,62.59 140.23,60.72 SENSOR2.1 140.23,60.65 140.23,58.3 | 140.23,58.3 138.36,56.43 C1.2 138.36,56.36 136.91,56.36 C2.2 136.91,56.29 136.91,56.01 130.81,49.92 129.84,49.92 U4.6 129.77,49.92 128.74,49.92 U4.9 | U4.9 128.74,50.13 128.74,49.99 128.18,49.43 127.83,49.43 U4.4 127.77,49.37 127.77,45.76 124.06,42.06 | U4.1 127.83,50.89 128.18,50.89 128.74,50.33 128.74,50.2 U4.9 | 129.43,36.55 125.34,36.55 | 125.34,36.55 124.65,36.55 R2_BAT.1 124.58,36.62 123.33,37.87 119.32,37.87 118.62,37.18 118.49,37.18 C1_BAT.2 118.49,37.11 v118.49,36.14 | 129.43,36.55 130.26,35.72 TP5.TP | C2_BAT.2 131.37,41.33 131.37,38.56 129.43,36.62 129.43,36.55 | 124.06,42.06 125.34,40.78 125.34,36.55 | 124.06,42.06 123.68,42.44 123.47,42.44 MCP73831.2 | 31.79,18.27 27.7,18.27 D12.1 | 31.79,18.27 33.03,17.02 D11.1 33.1,17.09 37.33,17.09 38.64,18.41 D10.1 41.34,18.41 43.56,16.19 D6.1 43.63,16.19 47.37,16.19 48.48,17.3 D8.1 48.61,17.37 54.02,22.77 54.02,22.98 C7.2 54.08,22.77 54.5,22.36 55.82,22.36 57.58,24.12
  Top 0.15: 31.79,18.27 31.79,18.34 32.62,19.17 32.62,28.52 31.99,29.14 31.99,29.35 D9.1 31.86,29.42 v29.98,29.42 | EPD_C11.2 68.77,20.49 67.24,20.49 EPD_C12.2 67.17,20.56 63.57,24.16 63.57,24.23 63.36,24.44 | 57.58,24.12 58.31,24.85 58.31,30.81 55.95,33.16 54.85,33.16 D3.1 | 63.36,24.44 61.22,24.44 59.9,23.12 58.59,23.12 57.58,24.12 | C11.2 92.31,55.25 92.31,55.74 93.21,56.64 93.21,58.23 92.59,58.85 83.38,58.85 78.18,53.66 78.18,53.31 U3.13 78.11,52.9 73.89,48.67 73.89,46.25 C8.2 73.82,46.18 73.06,45.42 73.06,36.9 | 73.06,36.9 73.06,34.62 U1.9 | EPD_C6.2 77.49,22.77 76.17,22.77 EPD_C7.2 76.11,22.7 74.51,22.7 EPD_C8.2 74.51,22.63 72.92,22.63 EPD_C9.2 72.85,22.7 71.4,22.7 EPD_C10.2 71.33,22.77 69.18,24.92 69.18,31.01 | EPD_C5.2 77.21,24.78 77.21,22.84 EPD_C6.2 | 69.18,31.01 69.18,31.71 | 69.18,31.71 69.18,32.61 U1.4 | 120.81,24.68 121.47,25.34 121.81,25.34 IC4.2 | 120.81,24.68 118.97,22.84 118.76,22.84 C1_BAT1.2 | 119.56,25.92 120.98,27.34 128.04,27.34 129.5,25.89 C3.- | 119.56,25.92 119.32,25.68 118.69,25.68 R1_PWRUSB.1 | v120.22,25.27 120.81,24.68 | 119.56,25.92 v119.46,26.03 | R2.1 91,27.76 91,25.68 90.86,25.54 SJ1.1 90.79,25.47 88.16,22.84 87.95,22.84 EPD_C1.2 87.88,22.84 87.53,23.19 85.66,23.19 EPD_C2.2 85.66,23.12 84.35,21.8 84.35,14.95 J1.8 84.28,14.88 84.28,14.53 | 79.78,14.53 77.7,12.45 75.34,12.45 J1.MP2 | 79.78,14.53 79.78,14.88 J1.17 79.78,14.95 79.78,20.28 77.56,22.5 77.56,22.7 EPD_C6.2 | 84.28,14.53 84.07,14.32 80.05,14.32 79.84,14.53 79.78,14.53 | 84.28,14.53 84.35,14.53 86.42,12.45 88.78,12.45 J1.MP1 88.78,12.52 95.43,19.17 | 95.43,19.17 95.43,19.8 R4.1
  Top 0.15: 95.43,19.17 95.43,19.1 97.16,19.1 100.41,22.36 112.88,22.36 TP4.TP 113.08,22.22 112.95,22.36 112.95,25.89 C1_BAT2.2 113.02,25.89 113.15,26.03 v113.78,26.03 | 73.06,36.9 77.49,36.9 77.63,36.76 77.63,34.89 77.14,34.41 76.45,34.41 75.48,33.44 75.48,32.19 75,31.71 69.18,31.71 | 63.36,24.44 63.36,30.46 63.92,31.01 69.18,31.01
  Bottom 0.15: v47.71,102.2 45.64,102.2 v44.94,101.51 44.87,101.51 v33.59,90.22 | v11.98,52.83 v9.76,50.61 9.76,49.64 v29.98,29.42 | v120.22,25.27 v119.46,26.03 118.49,26.03 | v113.78,26.03 118.49,26.03 | 118.49,26.03 v118.49,36.14
  pour Top: 72.96,10.16 72.98,10.18 91.22,10.18 91.24,10.16 91.26,10.14 91.28,10.12 91.28,0.08 170.12,0.08 170.12,67.12 92.18,67.12 92.16,67.14 92.14,67.16 92.12,67.18 92.12,111.12 69.08,111.12 69.08,109.98 69.06,109.96 69.04,109.94 69.02,109.92 19.48,109.92 19.46,109.94 19.44,109.96 19.42,109.98 19.42,111.22 0.08,111.22 0.08,65.48 6.32,65.48 6.34,65.46 6.36,65.44 6.38,65.42 6.38,47.28 6.36,47.26 6.34,47.24 6.32,47.22 0.08,47.22 0.08,0.18 72.92,0.08 72.92,10.12 72.94,10.14
  pour Bottom: 72.96,10.16 72.98,10.18 91.22,10.18 91.24,10.16 91.26,10.14 91.28,10.12 91.28,0.08 170.12,0.08 170.12,67.12 92.18,67.12 92.16,67.14 92.14,67.16 92.12,67.18 92.12,111.12 69.08,111.12 69.08,109.98 69.06,109.96 69.04,109.94 69.02,109.92 19.48,109.92 19.46,109.94 19.44,109.96 19.42,109.98 19.42,111.22 0.08,111.22 0.08,65.48 6.32,65.48 6.34,65.46 6.36,65.44 6.38,65.42 6.38,47.28 6.36,47.26 6.34,47.24 6.32,47.22 0.08,47.22 0.08,0.18 72.92,0.08 72.92,10.12 72.94,10.14
GPIO8
  Top 0.15: R1.1 20.71,39.74 20.71,45.83 19.18,47.36 19.18,47.56 U2.10
I2C_PW  (via drill 0.3)
  Top 0.15: 138.71,62.87 138.71,61.69 139.4,61 139.4,60.72 SENSOR2.2 139.4,60.65 139.4,58.85 138.29,57.74 C1.1 138.36,57.61 138.29,57.68 136.91,57.68 C2.1 136.84,57.68 136.56,57.68 134.83,55.94 R2-PINH.2 134.76,55.94 134.34,56.36 132.82,56.36 R1-PINH.2 v132.06,57.12 | 138.71,62.87 138.71,63.56 SENSOR2.6 | 138.71,62.87 137.53,62.87 137.32,63.08 137.32,64.11 137.81,64.6 139.47,64.6 140.23,63.84 140.23,63.63 SENSOR2.8 | v78.88,61.28 25.35,61.28 21.74,64.88 21.74,65.08 U2.17
  Bottom 0.15: v78.88,61.28 127.91,61.28 v132.06,57.12
INT_RTC
  Top 0.15: TP15.TP 74.17,66.47 76.11,66.47 R1_PINH1.1 76.17,66.4 76.17,66.12 79.36,62.94 79.36,62.59 U3.3 79.36,62.52 79.36,60.86 76.31,57.81 26.59,57.81 16.69,47.91 16.69,47.63 U2.8
IO/BOOT
  Top 0.15: C6.1 28.25,108.5 26.59,108.5 25.83,109.27 BOOT_BUTTON.3 25.76,109.27 BOOT_BUTTON.4 22.23,109.27 21.47,108.5 21.33,108.5 | 21.33,108.5 20.08,108.5 R_BOOT.2 | 21.33,108.5 21.33,107.19 34.76,93.75 34.76,73.26 26.66,65.15 24.31,65.15 U2.15
IO/CHANGE  (via drill 0.3)
  Top 0.15: CHANGE_BUTTON.4 62.33,109.27 65.79,109.27 CHANGE_BUTTON.3 65.86,109.2 67.66,109.2 68.35,108.5 C10.1 68.42,108.43 69.04,107.81 69.04,106.77 68.83,106.56 61.91,106.56 60.18,108.3 R_CHANGE.2 60.11,108.3 v57.06,108.3 | v34.28,85.51 14.13,65.36 14.13,65.15 U2.23
  Bottom 0.15: v57.06,108.3 v34.28,85.51
MISO  (via drill 0.3)
  Top 0.15: v9,68.48 9,65.15 U2.27 | v3.88,93.34 4.64,93.34 4.99,93.68 J4.P7 | v69.11,35.86 69.11,35.24 U1.2 | v62.39,67.86 62.39,68.2 61.42,69.17 TP6.TP
  Bottom 0.15: v3.88,93.34 9,88.21 v9,68.48 9,67.72 10.94,65.78 62.39,65.78 | v69.11,35.86 69.11,47.01 62.39,53.73 62.39,65.78 | v62.39,67.86 62.39,65.78
MOSI  (via drill 0.3)
  Top 0.15: J1.14 81.3,14.95 81.3,28.24 76.94,32.61 U1.5 76.87,32.68 v76.87,33.3 | TP7.TP 15.51,41.26 15.37,41.4 15.37,47.56 U2.7 15.37,47.63 v15.37,60.93 | v8.52,86.55 5.75,89.32 5.05,89.32 J4.P3
  Bottom 0.15: v8.52,86.55 8.52,67.78 v15.37,60.93 18.21,60.93 43.77,35.38 74.93,35.38 76.87,33.44 v76.87,33.3
N$1
  Top 0.15: R2-USB1.2 157.82,52.41 162.53,52.41 163.08,52.97 163.64,52.97 J2.A5
N$3
  Top 0.15: C1_BAT1.1 120.08,22.84 120.22,22.84 121.81,24.44 IC4.3 121.88,24.5 122.02,24.5 122.5,24.99 | 122.5,24.99 122.5,25.82 122.02,26.3 121.88,26.3 IC4.1 | 133.24,25.54 133.86,24.92 133.86,23.95 D2.2 | 133.24,25.54 133.24,30.39 136.35,33.51 Q1.2 | 122.5,24.99 127.97,24.99 128.39,24.57 132.2,24.57 133.17,25.54 133.24,25.54
N$5
  Top 0.15: R1_BAT.2 110.52,41.33 110.66,41.33 111.35,40.64 118.76,40.64 120.15,42.02 122.64,42.02 123.13,41.54 123.4,41.54 MCP73831.1
N$7
  Top 0.15: R2_BAT.2 124.58,37.94 124.37,37.94 120.84,41.47 MCP73831.5
N$8  (via drill 0.3)
  Top 0.15: v161.28,57.88 152.56,57.88 R2-USB.1 | v162.74,56.43 163.15,56.01 163.64,56.01 J2.B5
  Bottom 0.15: v162.74,56.43 v161.28,57.88
N$9
  Top 0.15: CHG_LED.C 115.02,43.2 113.64,43.2 111.84,41.4 R1_BAT.1
N$10
  Top 0.15: D4.1 59.28,23.81 59.35,23.88 59.35,27.55 C4.1 59.35,27.62 59.35,30.18 58.31,31.22 D3.2
N$12
  Top 0.15: R8.1 25.69,10.93 25.69,14.88 27.63,16.82 D12.2
N$13
  Top 0.15: R7.1 31.65,10.1 31.65,14.12 33.03,15.5 D11.2
N$14
  Top 0.15: R6.1 38.23,11.42 38.23,16.47 38.64,16.89 D10.2
N$15
  Top 0.15: R5.1 28.12,27.9 31.92,27.9 D9.2
N$16
  Top 0.15: R9.1 43.63,10.45 43.63,14.6 D6.2
N$17
  Top 0.15: R10.1 48.48,11 48.48,15.71 48.54,15.78 D8.2
N$18
  Top 0.15: C_DELAY.1 48.54,103.59 47.16,103.59 46.95,103.79 IC1.5
N$21
  Top 0.15: D7.2 84.48,64.88 84.48,63.63 88.5,59.61 R_CAPACITOR.1
N$30
  Top 0.15: J1.5 85.8,14.95 85.8,21.73 85.66,21.87 EPD_C2.1
N$31
  Top 0.15: J1.4 86.36,14.95 86.36,19.93 87.88,21.46 EPD_C1.1
PREVGH
  Top 0.15: J1.21 77.77,14.95 77.77,16.54 72.92,21.39 EPD_C9.1 72.85,21.46 72.3,22.01 70.98,22.01 64.61,28.38 64.61,30.32 D5.1
PREVGL
  Top 0.15: J1.23 76.8,14.88 76.8,14.53 76.59,14.32 73.61,14.32 68.83,19.1 EPD_C11.1 68.77,19.1 68.35,18.69 66.62,18.69 62.74,22.56 62.74,23.74 D4.2
RESE
  Top 0.15: J1.3 86.84,14.88 86.84,14.53 87.05,14.32 88.09,14.32 93.14,19.38 93.14,19.8 R3.1 93.21,19.86 93.21,22.08 97.92,26.79 97.92,27 Q3.2
RESE'
  Top 0.15: R3.2 91.89,19.86 91.89,25.06 92.31,25.47 SJ1.2 92.38,25.54 92.38,27.76 R2.2
RESET  (via drill 0.3)
  Top 0.15: C5.1 53.25,108.43 51.59,108.43 50.76,109.27 RESET_BUTTON.3 47.23,109.27 RESET_BUTTON.4 47.16,109.27 45.57,107.67 | 44.11,104.56 44.11,104.97 45.64,106.5 45.64,107.6 45.57,107.67 | 44.11,104.56 44.11,103.86 IC1.1 | 45.57,107.67 45.01,108.23 R_RESET.2 | v10.25,59.82 10.25,47.63 U2.3 | v44.04,104.56 44.11,104.56
  Bottom 0.15: v10.25,59.82 10.25,65.22 3.39,72.08 3.39,93.48 14.47,104.56 v44.04,104.56
RTC_RST
  Top 0.15: U2.16 23.06,65.08 23.06,64.81 24.03,63.84 77.14,63.84 78.11,62.87 78.11,62.59 U3.4
RX
  Top 0.15: U2.24 12.88,65.15 12.88,67.65 21.81,76.58 TP2.TP
SCK  (via drill 0.3)
  Top 0.15: J1.13 81.78,14.95 81.78,29.07 U1.6 76.87,33.92 76.59,33.92 v76.17,33.51 | TP8.TP 12.6,40.02 14.06,41.47 14.06,47.56 U2.6 14.06,47.63 14.06,47.91 v13.23,48.74 | v3.88,91.12 4.22,91.47 4.99,91.47 J4.P5
  Bottom 0.15: v3.88,91.12 3.88,72.01 13.23,62.66 v13.23,48.74 29.98,48.74 45.22,33.51 v76.17,33.51
SCL  (via drill 0.3)
  Top 0.15: v133.93,53.66 130.68,50.4 129.84,50.4 U4.7 | v133.93,56.84 134.41,56.84 134.76,57.19 R2-PINH.1 134.83,57.26 137.81,60.24 137.81,60.65 SENSOR2.4 | v165.3,21.8 165.3,20.77 J3.4 | v76.17,58.3 24.45,58.3 17.94,64.81 17.94,65.08 U2.20 | v81.3,54.42 81.3,53.94 81.92,53.31 U3.16 81.99,53.31 v84.07,55.39
  Bottom 0.15: v133.93,56.84 133.93,55.39 | 133.93,55.39 v133.93,53.66 133.93,53.59 165.3,22.22 v165.3,21.8 | v76.17,58.3 80.33,54.14 81.02,54.14 v81.3,54.42 | v84.07,55.39 133.93,55.39
SDA  (via drill 0.3)
  Top 0.15: SENSOR2.3 138.64,60.72 138.64,60.93 138.15,61.41 136.49,61.41 132.82,57.74 R1-PINH.1 132.75,57.68 131.99,57.68 129.84,55.53 129.84,50.96 U4.8 129.84,50.89 v130.54,50.89 | v161.63,19.8 165.3,19.8 J3.3 | v29.22,68.34 22.16,68.34 19.18,65.36 19.18,65.15 U2.19 | v80.47,54.63 80.47,53.45 80.61,53.31 U3.15
  Bottom 0.15: v161.63,19.8 v130.54,50.89 97.23,50.89 93.21,54.91 80.81,54.91 80.54,54.63 v80.47,54.63 66.76,68.34 v29.22,68.34
SRC  (via drill 0.3)
  Top 0.15: v93.28,26.44 95.84,26.44 Q3.3 | v61.98,26.44 60.8,27.62 C4.2 60.73,27.62 60.73,29.98 61.08,30.32 D5.2 61.01,30.39 61.01,31.77 59,33.78 54.15,33.78 54.02,33.65 54.02,32.68 55.4,31.29 55.4,30.25 L1.1
  Bottom 0.15: v61.98,26.44 v93.28,26.44
SS_SD
  Top 0.15: J4.P2 5.4,88.21 7.06,86.55 7.06,63.63 11.49,59.2 11.49,47.63 U2.4
TX
  Top 0.15: U2.25 11.56,65.15 11.56,71.25 19.6,79.28 TP1.TP
USB_D+  (via drill 0.3)
  Top 0.15: v142.72,56.5 148.4,56.5 D1.1 | v78.39,57.33 77.42,57.33 74.58,54.49 64.13,54.49 57.27,47.63 24.31,47.63 U2.14
  Bottom 0.15: v142.72,56.5 134.9,56.5 134.07,57.33 132.89,57.33 132.2,56.64 79.08,56.64 v78.39,57.33
USB_D-  (via drill 0.3)
  Top 0.15: v131.16,49.64 136.01,54.49 148.4,54.49 D1.3 | v62.88,53.87 29.02,53.87 23.06,47.91 23.06,47.63 U2.13
  Bottom 0.15: v131.16,49.64 67.1,49.64 v62.88,53.87
VBAT  (via drill 0.3)
  Top 0.3: U4.2 127.83,50.4 127.83,49.92 U4.3 127.7,49.85 127.35,49.85 123.47,45.97 123.47,43.48 MCP73831.3 123.61,43.41 v124.79,43.41 | Q1.3 135.38,35.72 135.38,39.67 TP3.TP 135.31,39.88 132.54,42.65 131.44,42.65 C2_BAT.1 131.3,42.79 v130.68,43.41
  Bottom 0.3: v130.68,43.41 v124.79,43.41
VBUS
  Top 0.3: MCP73831.4 120.77,43.41 120.63,43.27 116.55,43.27 CHG_LED.A 116.41,43.34 116.2,43.34 115.58,43.96 111.84,43.96 109.83,41.95 109.83,40.78 115.02,35.58 119.8,35.58 | R1_PWRUSB.2 118.69,27 121.12,29.42 TP14.TP 121.05,29.56 119.8,30.81 119.8,33.65 | 119.8,33.65 119.8,35.58 | 119.8,35.58 119.8,37.11 C1_BAT.1 | D1.5 150.97,55.46 150.55,55.46 149.37,54.28 149.37,51.86 148.4,50.89 PFMF.050.1.2 148.33,50.75 148.33,42.16 141.27,35.1 141.27,34.06 141.89,33.44 C4_USB.1 | 139.92,31.26 141.96,33.3 C4_USB.1 | 139.92,31.26 134.76,26.1 133.93,26.1 D2.1 | 139.92,31.26 136.84,34.34 135.87,34.34 135.11,33.58 134.48,33.58 Q1.1 134.34,33.65 119.8,33.65 | C5_USB.1 146.26,33.23 142.1,33.23 C4_USB.1
VRTC
  Top 0.15: C11.1 92.24,57.47 91.48,58.23 88.57,58.23 R_CAPACITOR.2 88.5,58.23 83.45,58.23 79.43,54.21 79.43,53.31 U3.14 79.36,53.24 79.36,52.9 75.21,48.74 75.21,46.25 C8.1
VRTC1
  Top 0.15: J1.24 74.17,14.95 69.39,19.73 67.73,19.73 67.24,19.24 EPD_C12.1
VRTC4
  Top 0.15: J1.20 78.25,14.95 78.25,17.58 74.58,21.25 EPD_C8.1
VRTC5
  Top 0.15: J1.19 78.81,14.95 78.81,18.76 76.17,21.39 EPD_C7.1
VRTC6
  Top 0.15: J1.18 79.29,14.95 79.29,19.66 77.56,21.39 EPD_C6.1
VRTC7
  Top 0.15: J1.22 77.28,14.95 77.28,15.5 71.4,21.39 EPD_C10.1
VUSB
  Top 0.3: J2.A9 163.71,56.77 163.71,56.57 J2.B4 163.84,56.5 164.33,56.5 164.88,55.94 164.88,52.55 164.4,52.07 163.84,52.07 J2.B9 163.71,52 163.71,51.72 J2.A4 163.57,51.65 153.67,51.65 152.9,50.89 PFMF.050.1.1